# Altium PCB PCB1.PcbDoc
Units mm, origin at the board's own origin, x right, y up, seen from the top; angles counter-clockwise.
Board outline 130 x 130 mm, 2 copper layers (Top Layer, Bottom Layer); 79 components, 5 nets, 160 pads, 0 vias.
Unrouted connection lines stored in the file: 2.
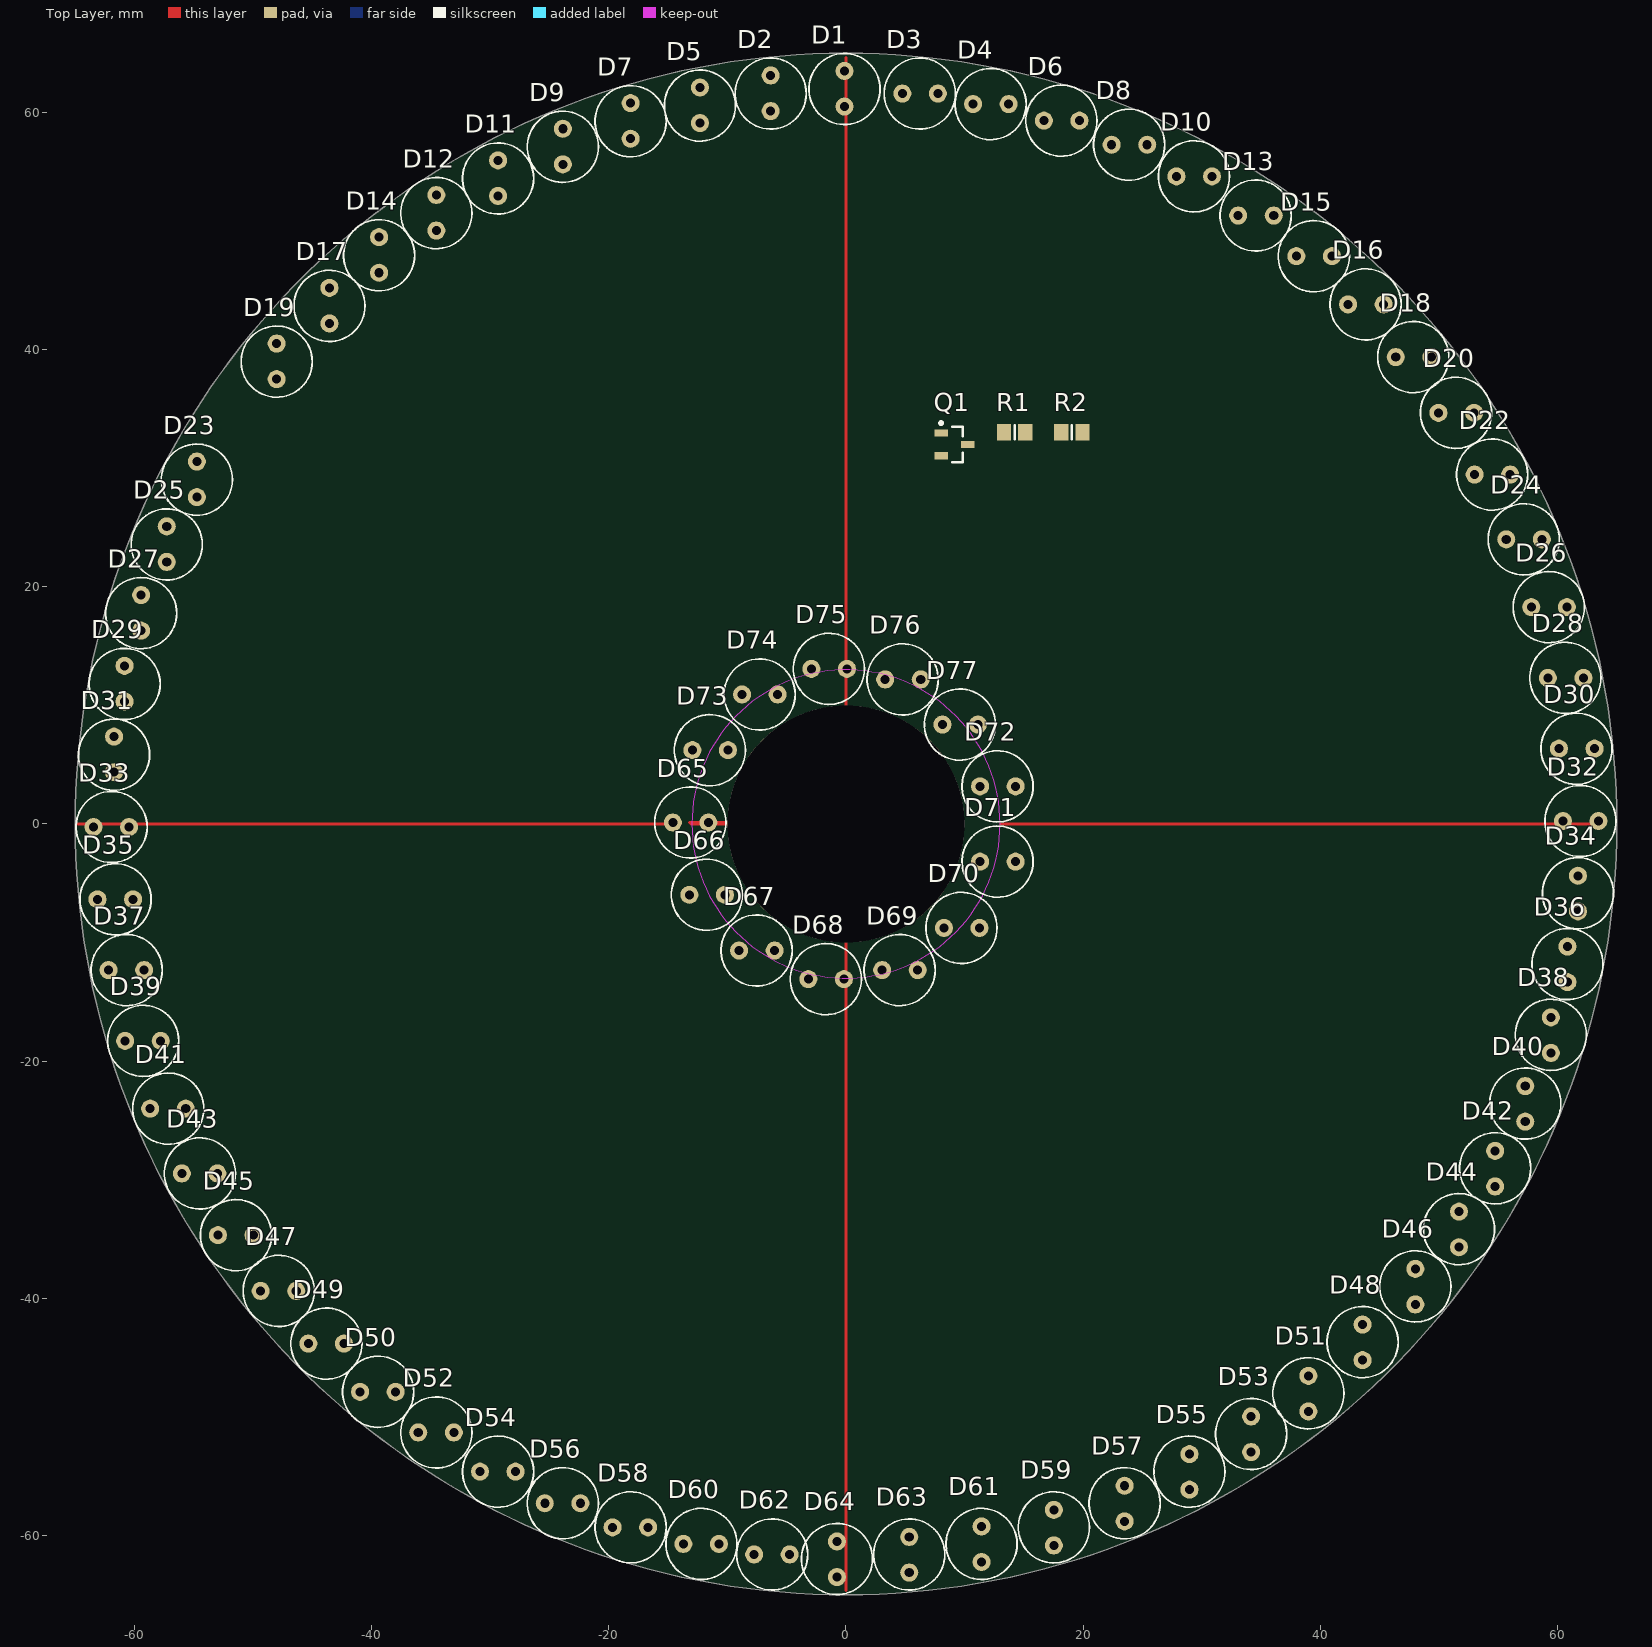
[diagram p0: Top Layer view]
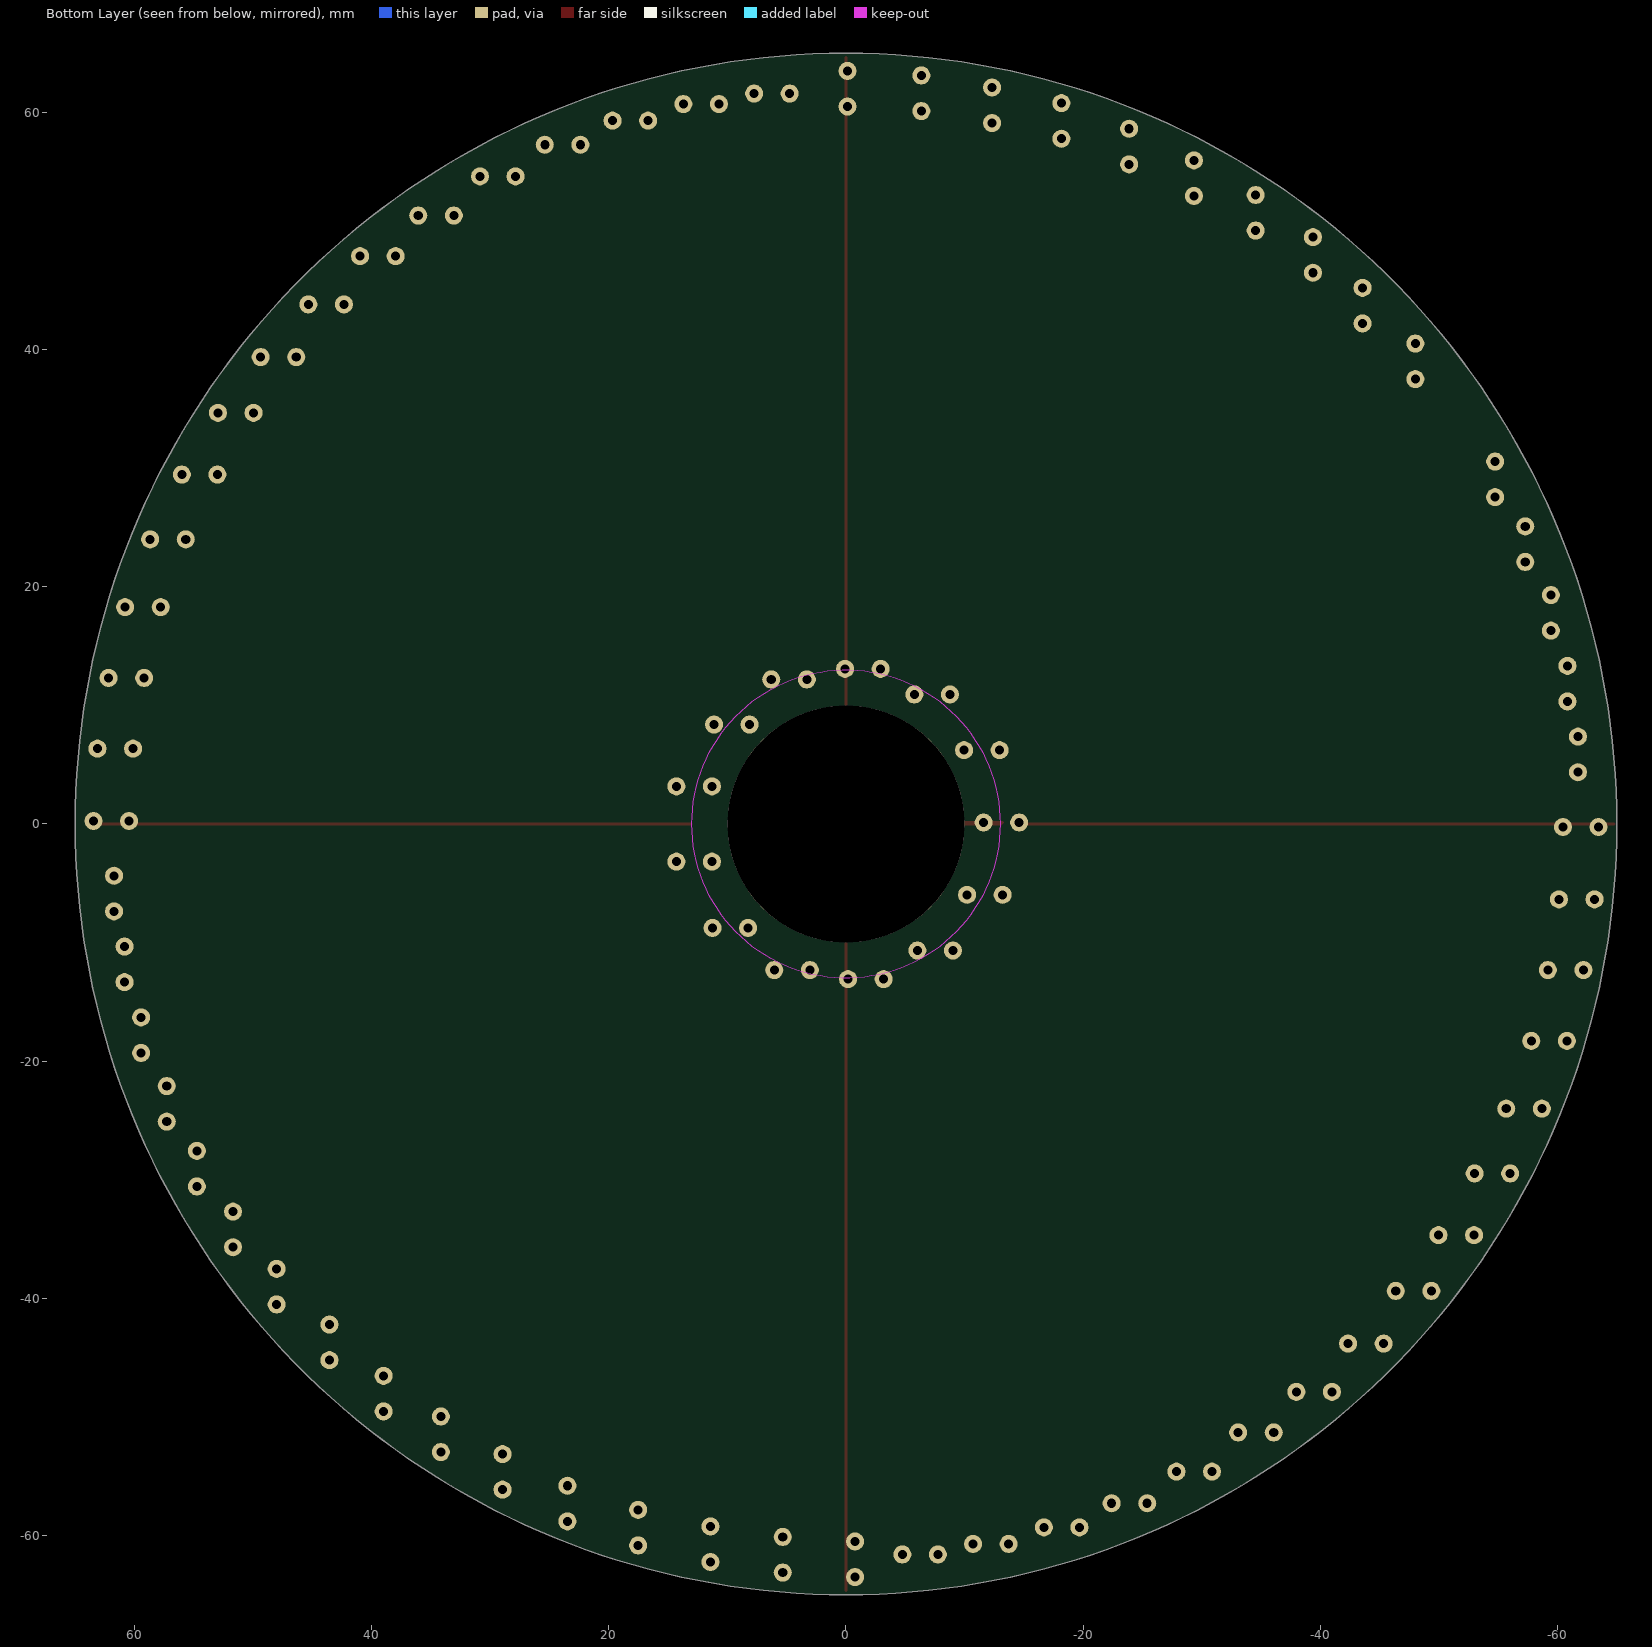
[diagram p1: Bottom Layer view, seen from below]

## Layer stack, top to bottom
Top Solder: solder mask 0.0102, Solder Resist, Dk 3.5
Top Layer: signal copper 0.0356
Dielectric 1: dielectric 0.32, FR-4, Dk 4.8
Bottom Layer: signal copper 0.0356
Bottom Solder: solder mask 0.0102, Solder Resist, Dk 3.5

## Board outline
-65,0 ccw(c0,0) 0,-65 ccw(c0,0) 65,0 ccw(c0,0) 0,65 ccw(c0,0)

## Design rules (kind name [scope] priority, off if disabled: settings)
Clearance [All] p1: gap=0.254 ignorepadtopadclearanceinfootprint=FALSE except(0: Arc-Hole Track-Hole SMDPad-Hole THPad-Hole Via-Hole Fill-Hole Poly-Hole Region-Hole Text-Hole)
PolygonConnect [All] p1: connectstyle=Relief reliefconductorwidth=0.254 reliefentries=4 polygonreliefangle="90 Angle" airgapwidth=0.254
RoutingVias [All] p1: holewidth=0.711 width=1.27 viastyle="Through Hole" minholewidth=0.711 minwidth=1.27 maxholewidth=0.711 maxwidth=1.27
SolderMaskExpansion [All] p1: expansion=0.102
Width [All] p1: maxlimit=0.254 minlimit=0.254 preferedwidth=0.254
30 further rules are at their usual default settings.

## Classes and differential pairs
component class GZ: Q1 R1 R2

## Components (designator, comment, footprint, x,y, rotation, side; value= is the part's Value field where it differs from the comment)
D1 "LED0" 5mm -0.127,63.5 r270 top
D2 "LED0" 5mm -6.35,63.119 r270 top (schematic designator D1)
D3 "LED0" 5mm 7.747,61.595 r180 top (schematic designator D1)
D4 "LED0" 5mm 13.716,60.706 r180 top (schematic designator D1)
D5 "LED0" 5mm -12.319,62.103 r270 top (schematic designator D1)
D6 "LED0" 5mm 19.685,59.309 r180 top (schematic designator D1)
D7 "LED0" 5mm -18.161,60.785 r270 top (schematic designator D1)
D8 "LED0" 5mm 25.4,57.277 r180 top (schematic designator D1)
D9 "LED0" 5mm -23.876,58.626 r270 top (schematic designator D1)
D10 "LED0" 5mm 30.861,54.61 r180 top (schematic designator D1)
D11 "LED0" 5mm -29.337,55.959 r270 top (schematic designator D1)
D12 "LED0" 5mm -34.544,53.038 r270 top (schematic designator D1)
D13 "LED0" 5mm 36.068,51.308 r180 top (schematic designator D1)
D14 "LED0" 5mm -39.37,49.482 r270 top (schematic designator D1)
D15 "LED0" 5mm 40.973,47.879 r180 top (schematic designator D1)
D16 "LED0" 5mm 45.339,43.815 r180 top (schematic designator D1)
D17 "LED0" 5mm -43.561,45.212 r270 top (schematic designator D1)
D18 "LED0" 5mm 49.355,39.37 r180 top (schematic designator D1)
D19 "LED0" 5mm -48.006,40.513 r270 top (schematic designator D1)
D20 "LED0" 5mm 52.959,34.671 r180 top (schematic designator D1)
D22 "LED0" 5mm 56.007,29.464 r180 top (schematic designator D1)
D23 "LED0" 5mm -54.737,30.559 r270 top (schematic designator D1)
D24 "LED0" 5mm 58.674,24.003 r180 top (schematic designator D1)
D25 "LED0" 5mm -57.277,25.098 r270 top (schematic designator D1)
D26 "LED0" 5mm 60.785,18.288 r180 top (schematic designator D1)
D27 "LED0" 5mm -59.436,19.304 r270 top (schematic designator D1)
D28 "LED0" 5mm 62.182,12.319 r180 top (schematic designator D1)
D29 "LED0" 5mm -60.833,13.335 r270 top (schematic designator D1)
D30 "LED0" 5mm 63.119,6.35 r180 top (schematic designator D1)
D31 "LED0" 5mm -61.722,7.366 r270 top (schematic designator D1)
D32 "LED0" 5mm 63.452,0.254 r180 top (schematic designator D1)
D33 "LED0" 5mm -63.452,-0.254 r0 top (schematic designator D1)
D34 "LED0" 5mm 61.722,-7.366 r90 top (schematic designator D1)
D35 "LED0" 5mm -63.119,-6.35 r0 top (schematic designator D1)
D36 "LED0" 5mm 60.833,-13.335 r90 top (schematic designator D1)
D37 "LED0" 5mm -62.182,-12.319 r0 top (schematic designator D1)
D38 "LED0" 5mm 59.436,-19.304 r90 top (schematic designator D1)
D39 "LED0" 5mm -60.785,-18.288 r0 top (schematic designator D1)
D40 "LED0" 5mm 57.277,-25.098 r90 top (schematic designator D1)
D41 "LED0" 5mm -58.674,-24.003 r0 top (schematic designator D1)
D42 "LED0" 5mm 54.737,-30.559 r90 top (schematic designator D1)
D43 "LED0" 5mm -56.007,-29.464 r0 top (schematic designator D1)
D44 "LED0" 5mm 51.689,-35.687 r90 top (schematic designator D1)
D45 "LED0" 5mm -52.959,-34.671 r0 top (schematic designator D1)
D46 "LED0" 5mm 48.006,-40.513 r90 top (schematic designator D1)
D47 "LED0" 5mm -49.355,-39.37 r0 top (schematic designator D1)
D48 "LED0" 5mm 43.561,-45.212 r90 top (schematic designator D1)
D49 "LED0" 5mm -45.339,-43.815 r0 top (schematic designator D1)
D50 "LED0" 5mm -40.973,-47.879 r0 top (schematic designator D1)
D51 "LED0" 5mm 38.989,-49.53 r90 top (schematic designator D1)
D52 "LED0" 5mm -36.068,-51.308 r0 top (schematic designator D1)
D53 "LED0" 5mm 34.163,-52.959 r90 top (schematic designator D1)
D54 "LED0" 5mm -30.861,-54.61 r0 top (schematic designator D1)
D55 "LED0" 5mm 28.956,-56.134 r90 top (schematic designator D1)
D56 "LED0" 5mm -25.4,-57.277 r0 top (schematic designator D1)
D57 "LED0" 5mm 23.495,-58.801 r90 top (schematic designator D1)
D58 "LED0" 5mm -19.685,-59.309 r0 top (schematic designator D1)
D59 "LED0" 5mm 17.526,-60.833 r90 top (schematic designator D1)
D60 "LED0" 5mm -13.716,-60.706 r0 top (schematic designator D1)
D61 "LED0" 5mm 11.43,-62.23 r90 top (schematic designator D1)
D62 "LED0" 5mm -7.747,-61.595 r0 top (schematic designator D1)
D63 "LED0" 5mm 5.334,-63.119 r90 top (schematic designator D1)
D64 "LED0" 5mm -0.762,-63.5 r90 top (schematic designator D1)
D65 "LED0" 5mm -11.605,0.127 r180 top (schematic designator D1)
D66 "LED0" 5mm -10.208,-5.969 r180 top (schematic designator D1)
D67 "LED0" 5mm -6.017,-10.668 r180 top (schematic designator D1)
D68 "LED0" 5mm -0.175,-13.081 r180 top (schematic designator D1)
D69 "LED0" 5mm 6.048,-12.319 r180 top (schematic designator D1)
D70 "LED0" 5mm 11.255,-8.763 r180 top (schematic designator D1)
D71 "LED0" 5mm 14.303,-3.175 r180 top (schematic designator D1)
D72 "LED0" 5mm 14.303,3.175 r180 top (schematic designator D1)
D73 "LED0" 5mm -9.954,6.223 r180 top (schematic designator D1)
D74 "LED0" 5mm -5.763,10.922 r180 top (schematic designator D1)
D75 "LED0" 5mm 0.079,13.081 r180 top (schematic designator D1)
D76 "LED0" 5mm 6.302,12.192 r180 top (schematic designator D1)
D77 "LED0" 5mm 11.128,8.382 r180 top (schematic designator D1)
Q1 "QNPN" SOT-23B_N 9.144,32.004 r0 top
R1 "Res2" 6-0805_N 14.224,33.02 r0 top value=1K (schematic designator R2)
R2 "Res2" 6-0805_N 19.05,33.02 r0 top value=1K (schematic designator R1)

## Footprints (in the part's own frame and the unit in brackets; to place one, negate y for a bottom-side part, rotate by r counter-clockwise, add the part's x,y. Pads: shape width x height; smd on the part's side, far side on the other; paste and mask are expansions set on the pad)
5mm [mil]
  round 60 hole 30: 1(0,0) 2(118.11,0)
  silkscreen extent -58,-118 178,118
6-0805_N [mm] "Chip Resistor, Body 2.0x1.2mm, IPC Medium Density"
  rect 1.2x1.4 smd: 1(-0.9,0) 2(0.9,0)
  silkscreen extent 0,-0.6 0,0.6, body extent -1.07,-0.7 1.07,0.7, height 0.7
SOT-23B_N [mm] "SOT23, 3-Leads, Body 2.9x1.3mm, Pitch 0.95mm, Lead Span 2.4mm, IPC Medium Density"
  rect 1.15x0.6 smd: 1(-1.125,0.95) 2(-1.125,-0.95) 3(1.125,0)
  silkscreen extent -1.25,-1.5 0.7,1.92, body extent -0.7,-1.5 0.7,1.5, height 1.14

## Part data
D1 D2 D3 D4 D5 D6 D7 D8 D9 D10 D11 D12 D13 D14 D15 D16 D17 D18 D19 D20 D22 D23 D24 D25 D26 D27 D28 D29 D30 D31 D32 D33 D34 D35 D36 D37 D38 D39 D40 D41 D42 D43 D44 D45 D46 D47 D48 D49 D50 D51 D52 D53 D54 D55 D56 D57 D58 D59 D60 D61 D62 D63 D64 D65 D66 D67 D68 D69 D70 D71 D72 D73 D74 D75 D76 D77: "Typical INFRARED GaAs LED", LatestRevisionDate=08-Jul-2005, LatestRevisionNote="Mech Layer 1 removed.", PackageDescription="LED; 2 Leads", PackageReference=LED-0, Published=8-Jun-2000, Publisher="Altium Limited"
Q1: "NPN Bipolar Transistor", LatestRevisionDate=29-May-2009, LatestRevisionNote="IPC-7351 Footprint Added.", PackageDescription="3-Pin SOT-23 Package 0.95 mm Pitch, 2.4 mm Lead Span", PackageReference=SOT-23B, PackageVersion=Aug-1999, Published=8-Jun-2000, Publisher="Altium Limited"
R1 R2: "Resistor", LatestRevisionDate=17-Jul-2002, LatestRevisionNote="Re-released for DXP Platform.", PackageDescription="Axial Device, Thru-Hole; 2 Leads; 0.4 in Pin Spacing", PackageReference=AXIAL-0.4, Published=8-Jun-2000, Publisher="Altium Limited"

## Free pads (board coordinates)
  round 20 hole 20: 8(0,0)

## Nets (pads, with @x,y where several pads share a name; then routed paths per layer and width w, separated by ;. In a path a pad name is that pad's centre, name@x,y a point inside that pad or via, vN(x,y) a via of type N, cw(c..) or ccw(c..) an arc to the next point about the centre after c; other vN are vias at no path point)
GND: 
NetD1_1: Q1.3
NetQ1_1: Q1.1 R2.2
NetQ1_2: Q1.2 R1.1
VCC: R2.1
pads on no net: D1.1 D1.2 D2.1 D2.2 D3.1 D3.2 D4.1 D4.2 D5.1 D5.2 D6.1 D6.2 D7.1 D7.2 D8.1 D8.2 D9.1 D9.2 D10.1 D10.2 D11.1 D11.2 D12.1 D12.2 D13.1 D13.2 D14.1 D14.2 D15.1 D15.2 D16.1 D16.2 D17.1 D17.2 D18.1 D18.2 D19.1 D19.2 D20.1 D20.2 D22.1 D22.2 D23.1 D23.2 D24.1 D24.2 D25.1 D25.2 D26.1 D26.2 D27.1 D27.2 D28.1 D28.2 D29.1 D29.2 D30.1 D30.2 D31.1 D31.2 D32.1 D32.2 D33.1 D33.2 D34.1 D34.2 D35.1 D35.2 D36.1 D36.2 D37.1 D37.2 D38.1 D38.2 D39.1 D39.2 D40.1 D40.2 D41.1 D41.2 D42.1 D42.2 D43.1 D43.2 D44.1 D44.2 D45.1 D45.2 D46.1 D46.2 D47.1 D47.2 D48.1 D48.2 D49.1 D49.2 D50.1 D50.2 D51.1 D51.2 D52.1 D52.2 D53.1 D53.2 D54.1 D54.2 D55.1 D55.2 D56.1 D56.2 D57.1 D57.2 D58.1 D58.2 D59.1 D59.2 D60.1 D60.2 D61.1 D61.2 D62.1 D62.2 D63.1 D63.2 D64.1 D64.2 D65.1 D65.2 D66.1 D66.2 D67.1 D67.2 D68.1 D68.2 D69.1 D69.2 D70.1 D70.2 D71.1 D71.2 D72.1 D72.2 D73.1 D73.2 D74.1 D74.2 D75.1 D75.2 D76.1 D76.2 D77.1 D77.2 R1.2
copper on no net: | length 257
  Top Layer w0.254: -64.77,0 -13.97,0 ; -13.208,0.127 0,0.127 0,13.184 0,13.188 ; -13.061,0 -13.057,0 0,0 0,-13.208 0,-64.643 ; 0,-13.188 0,-13.184 ; 0,13.208 0,64.643 ; 13.057,0 13.061,0 ; 13.081,0 63.881,0

## Keep-outs
Keep-Out Layer:
  circle w0.1: c0,0 r13